# EAGLE board Outlet2 (EAGLE 7.5.0)
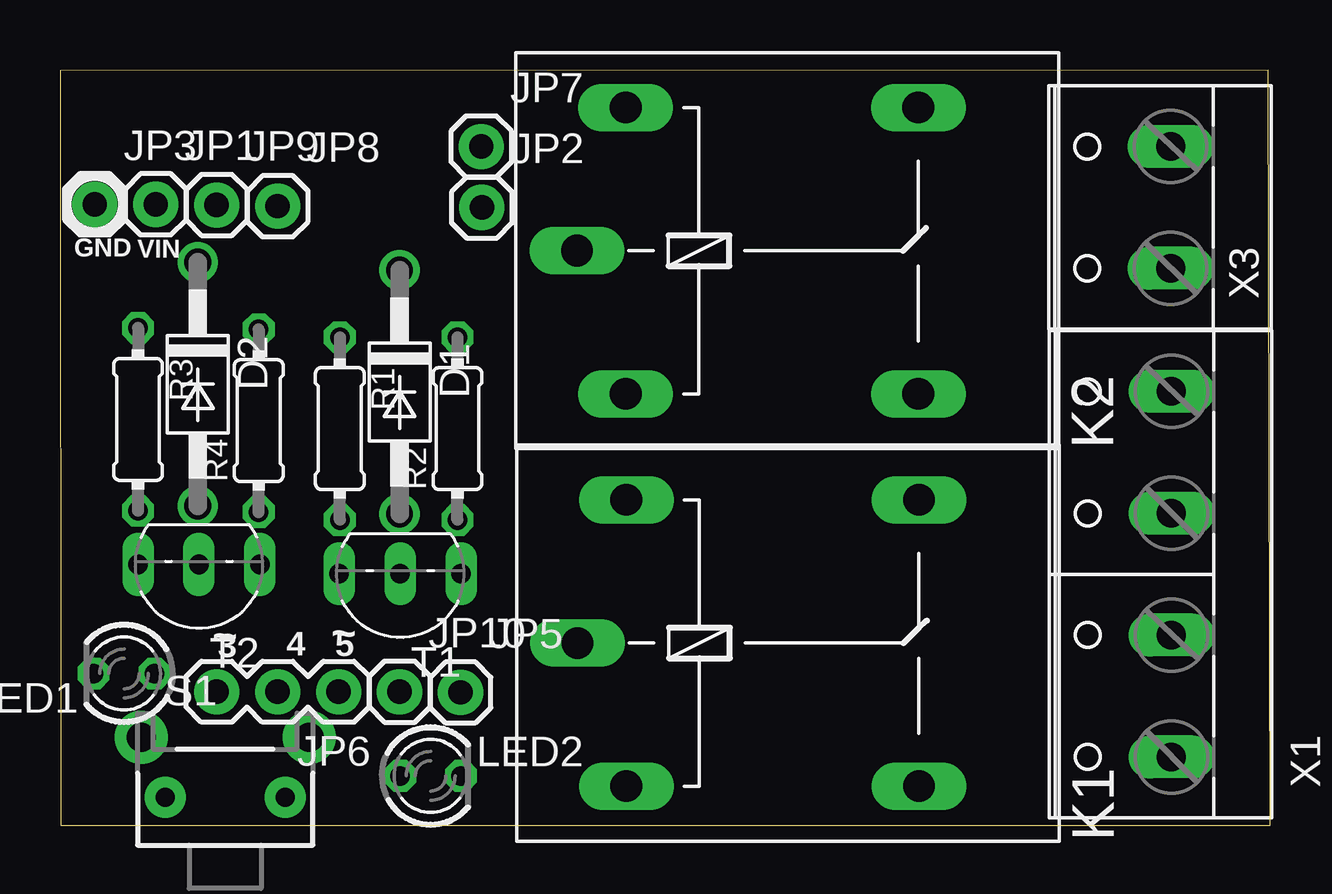
[diagram p0: board, top side]
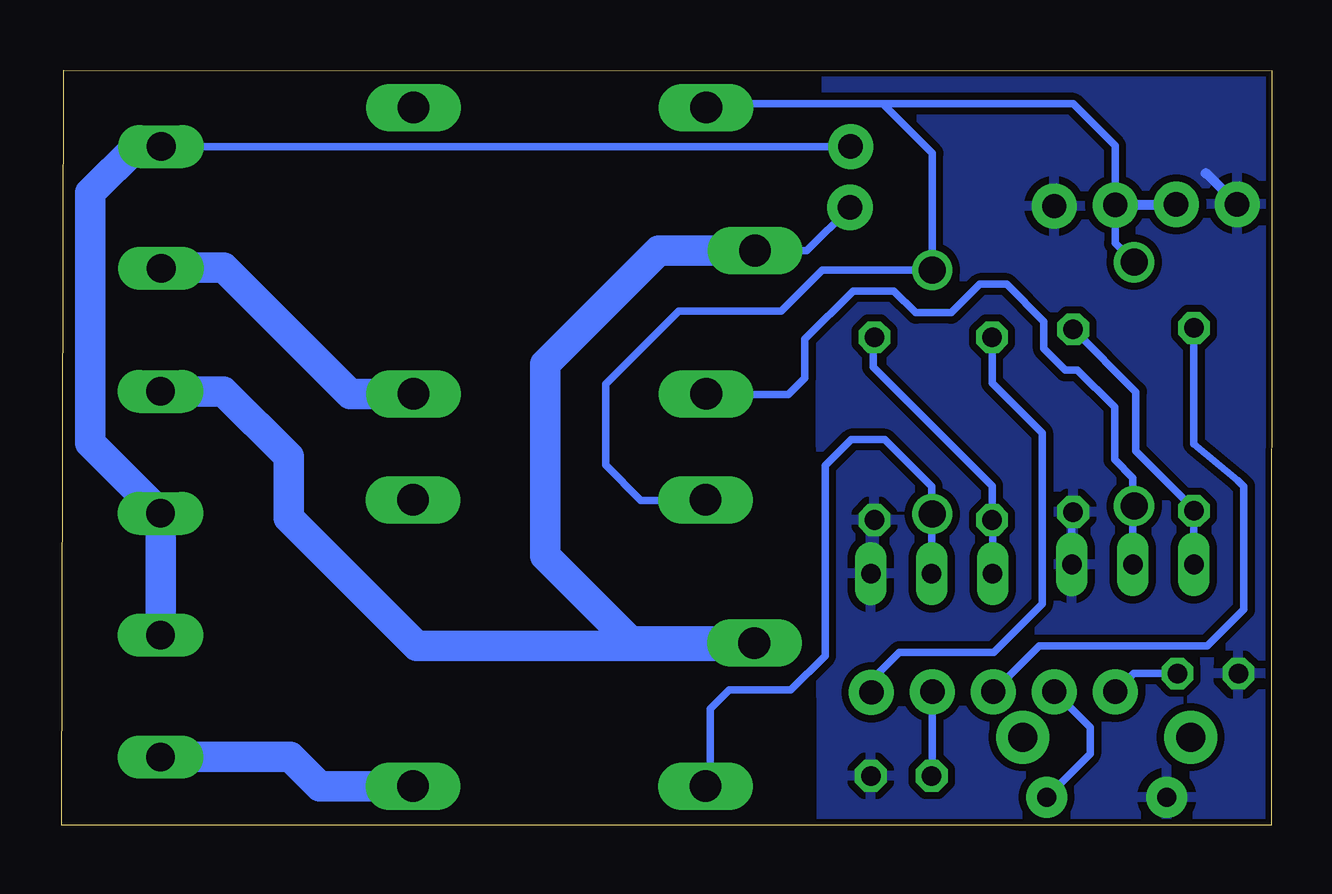
[diagram p1: board, bottom side, seen from below]

Size 50.42 x 31.47 mm. Coordinates in mm from the lower left corner, seen from the top.
Outline: 50.42,0 50.34,31.47 0,31.45 0.03,0 50.42,0
Copper layers (1*16): Top 0.035mm / dielectric 1.5mm / Bottom 0.035mm
Design rules "ITEADstudio_DRC *": minimum track width 6mil, minimum drill 12mil, track to track 12mil, track to pad 12mil, pad to pad 6mil, via to via 6mil, smd to smd 0mil, copper to edge 10mil, drill to drill 10mil, minimum pad ring 10mil, minimum via ring 6mil, stop-mask expansion 2mil, vias tented up to drill 100mil, thermal gap 15mil
Net classes: 1 power: width 0.381 mm, clearance 0.254 mm

## Footprints (pad centres in the part's own frame; a part is rotated, then mirrored left to right if it is on the bottom)
DO41-10 = drill 1.118: A 5.08,0; C -5.08,0
1X01 = drill 1.016 pad 1.88: 1 0,0
1X03 = drill 1.016 pad 1.88: 1 0,0; 2 2.54,0; 3 5.08,0
G5LE = drill 1.321 long: 1 -7.493,-5.969; 2 -7.493,5.969; O 4.699,5.969; P -9.525,0; S 4.699,-5.969
LED3MM = drill 0.813 octagon: A -1.27,0; K 1.27,0
0204/7 = drill 0.813 octagon: 1 -3.81,0; 2 3.81,0
TACTILE-PTH-SIDEEZ = drill 0.8 pad 1.7: 1 -2.5,0; 2 2.5,0 | drill 1.2 pad 2.2: ANCHOR1 -3.5,2.5; ANCHOR2 3.5,2.5
TO92-ECB = drill 0.813 long: B 2.54,0; C 0,0; E -2.54,0
W237-4P = drill 1.194 long: 1 -7.62,-0.635; 2 -2.54,-0.635; 3 2.54,-0.635; 4 7.62,-0.635
W237-132 = drill 1.194 long: 1 -2.54,-0.635; 2 2.54,-0.635

## Placement (x,y rotation side)
D1  1N4004  [DO41-10]  14.15,18.06 270 top
D2  1N4004  [DO41-10]  5.74,18.39 270 top
JP1  M01PTH  [1X01]  3.99,25.88 0 top
JP2  M01PTH  [1X01]  17.58,25.76 0 top
JP3  M01PTH  [1X01]  1.45,25.88 0 top
JP5  M01PTH  [1X01]  16.69,5.54 0 top
JP6  [1X03]  11.61,5.56 180 top
JP7  M01PTH  [1X01]  17.55,28.3 0 top
JP8  M01PTH  [1X01]  9.07,25.81 0 top
JP9  M01PTH  [1X01]  6.53,25.86 0 top
JP10  M01PTH  [1X01]  14.15,5.56 0 top
K1  G5L  [G5LE]  31.09,7.59 0 top
K2  G5L  [G5LE]  31.06,23.95 0 top
LED1  [LED3MM]  2.67,6.32 180 top
LED2  [LED3MM]  15.44,2.06 0 top
R1  [0204/7]  11.66,16.54 270 top
R2  [0204/7]  16.56,16.54 90 top
R3  [0204/7]  3.25,16.92 270 top
R4  [0204/7]  8.28,16.87 90 top
S1  SWITCH-MOMENTARY-2SIDE_EZ  [TACTILE-PTH-SIDEEZ]  6.88,1.17 0 top
T1  2SC458  [TO92-ECB]  14.17,10.49 180 top
T2  2SC458  [TO92-ECB]  5.79,10.87 180 top
X1  Out- In- Out+ In+  [W237-4P]  45.67,10.46 90 top
X3  [W237-132]  45.64,25.76 90 top

## Library data of the parts
D1 D2 = diode
JP1-JP3 JP5-JP10 = SparkFun-Connectors
K1 K2 = relay; OC_FARNELL: unknown; OC_NEWARK: unknown
LED1 LED2 = led
R1-R4 = resistor
S1 = SparkFun-Electromechanical
T1 T2 = transistor
X1 = con-wago-508; MF: In-; MPN: Out-; OC_FARNELL: unknown; OC_NEWARK: unknown
X3 = con-wago-508; OC_FARNELL: unknown; OC_NEWARK: unknown

## Nets
AGND [power]: LED1.K LED2.K S1.1
GND [power]: JP3.1 JP8.1 R2.1 R4.1 T1.E T2.E
N$1: JP6.2 S1.2
N$2: K2.S X3.1
N$3: JP6.3 LED1.A
N$4: R1.2 R2.2 T1.B
N$5: JP10.1 LED2.A
N$6: D1.A K1.1 T1.C
N$7: JP5.1 R1.1
N$8: K1.S X1.1
N$9: JP2.1 K1.P K2.P X1.4
N$10: JP6.1 R3.1
N$11: R3.2 R4.2 T2.B
N$12: D2.A K2.1 T2.C
N$13: D1.C D2.C JP1.1 JP9.1 K1.2 K2.2
N$15: JP7.1 X1.2 X1.3 X3.2

## Tracks (layer width: path | path; a pad name or v marks a point on that pad's centre or on a via)
AGND
  pour Bottom: -0.03,31.55 18.85,31.42 18.77,0.1 -0.18,0 -0.25,27.89
GND
  Bottom 0.305: T2.E 8.33,13.01 R4.1
  Bottom 0.406: JP3.1 2.74,27.18 2.77,27.18
  pour Bottom: -0.03,31.5 18.57,31.32 18.49,0.15 0.03,0.23
N$1
  Bottom 0.305: JP6.2 9.04,5.56 7.57,4.09 7.57,2.98 S1.2
N$2
  Bottom 1.27: K2.S 38.4,17.98 43.66,23.24 46.25,23.24 X3.1
N$3
  Bottom 0.305: LED1.A 5.77,6.32 JP6.3
N$4
  Bottom 0.305: T1.B 11.63,12.7 R1.2 11.66,14.15 16.61,19.1 16.61,20.29 R2.2
N$5
  Bottom 0.305: JP10.1 14.15,2.08 LED2.A
N$6
  Bottom 0.305: D1.A 14.17,12.85 T1.C 14.17,14.12 16.13,16.08 17.53,16.08 18.62,14.99 18.62,7.06 20.04,5.64 22.61,5.64 23.39,4.85 23.39,1.83 K1.1
N$7
  Bottom 0.305: 16.71,5.56 JP5.1 16.69,6.05 15.52,7.21 11.58,7.21 9.58,9.22 9.58,16.36 11.66,18.44 R1.1
N$8
  Bottom 1.27: X1.1 40.89,2.85 39.67,1.63 K1.S
N$9
  Bottom 0.305: 21.26,24.23 K2.P 19.38,23.95 JP2.1
  Bottom 1.27: K2.P 25.55,23.95 30.28,19.23 30.28,11.23 26.72,7.67 21.64,7.67 K1.P 21.69,7.47 35.64,7.47 40.97,12.8 40.97,15.37 43.69,18.09 X1.4
N$10
  Bottom 0.305: R3.1 3.25,15.9 1.42,14.38 1.17,14.12 1.17,8.99 2.69,7.47 9.7,7.47 JP6.1
N$11
  Bottom 0.305: T2.B R3.2 3.25,13.18 5.66,15.6 5.66,18.06 R4.2
N$12
  Bottom 0.305: T2.C 5.79,13.26 | 5.79,13.26 D2.A | K2.1 23.55,17.96 20.14,17.96 19.46,18.64 19.46,20.27 17.45,22.28 15.75,22.28 14.83,21.36 13.36,21.36 12.17,22.56 11.05,22.56 9.5,21.01 9.5,19.86 8.61,18.97 8.1,18.97 6.55,17.42 6.55,15.24 5.79,14.48 5.79,13.26
N$13
  Bottom 0.305: JP1.1 4.06,25.81 | D2.C 6.53,24.26 JP9.1 6.53,28.32 8.28,30.07 16.2,30.07 | 16.2,30.07 23.42,30.07 K2.2 | 16.2,30.07 14.15,28.02 D1.C 18.74,23.14 20.45,21.44 24.71,21.44 27.76,18.39 27.76,15.01 26.29,13.54 23.62,13.54 K1.2
  Bottom 0.406: 4.06,25.81 4.11,25.86 JP9.1
N$15
  Bottom 0.305: 46.28,27.79 X3.2 JP7.1
  Bottom 1.27: X1.2 X1.3 49.22,15.93 49.22,26.37 47.29,28.3 X3.2

## Text on the board
_tsilk: GND | VIN | 3 | 4 | 5 | ~ | ~